# Altium PCB BatteryManagementSystem_old.PcbDoc
Units mil, origin at the board's own origin, x right, y up, seen from the top; angles counter-clockwise.
Board outline 4250 x 3500 mil, 4 copper layers (Top Layer, Power, Ground, Bottom Layer); 214 components, 165 nets, 695 pads, 117 vias.
Unrouted connection lines stored in the file: 115.
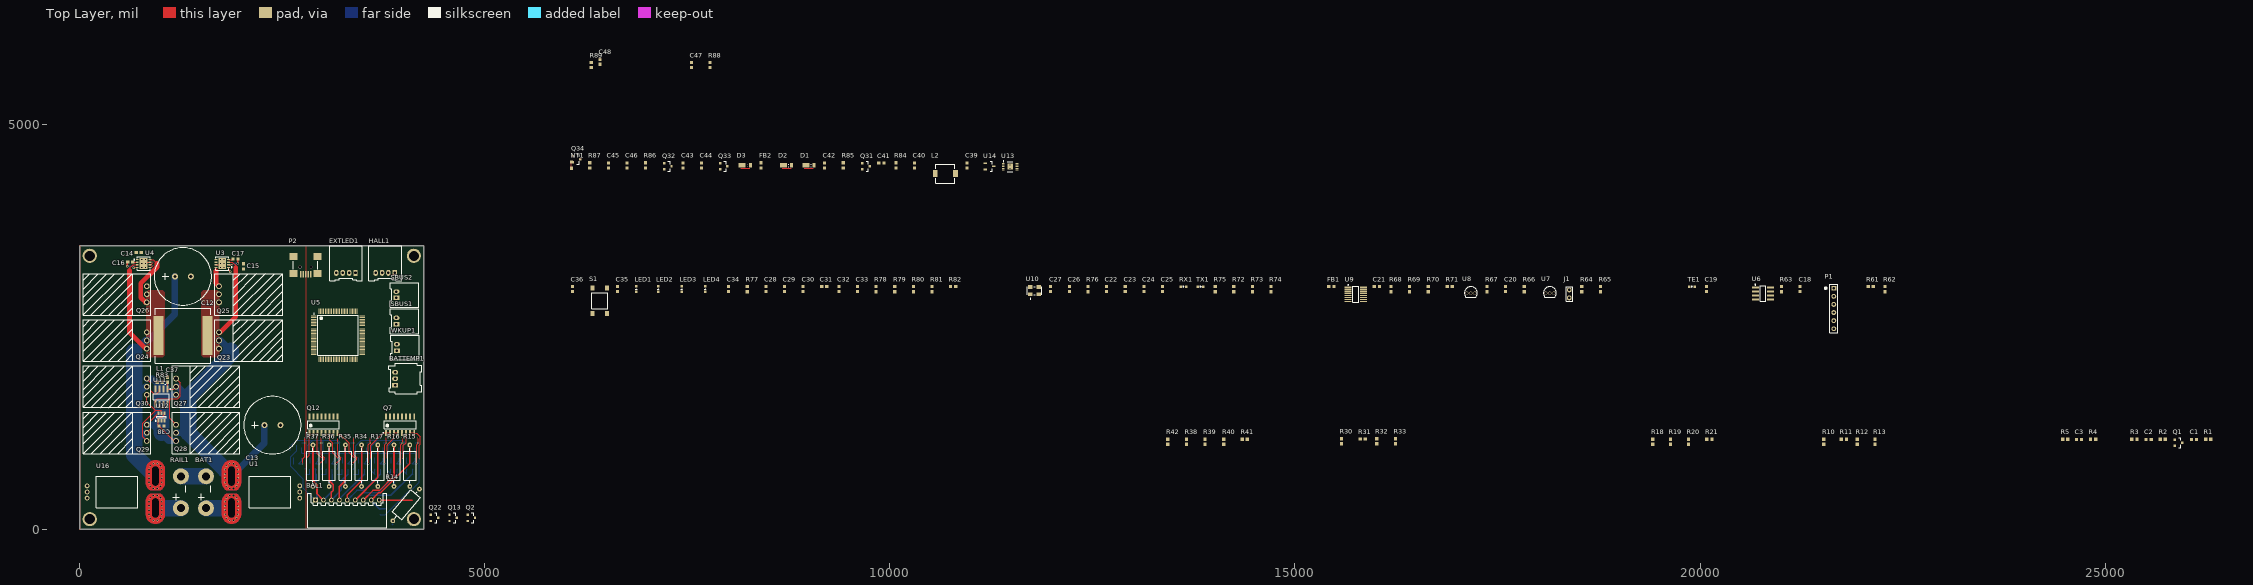
[diagram p0: Top Layer view]
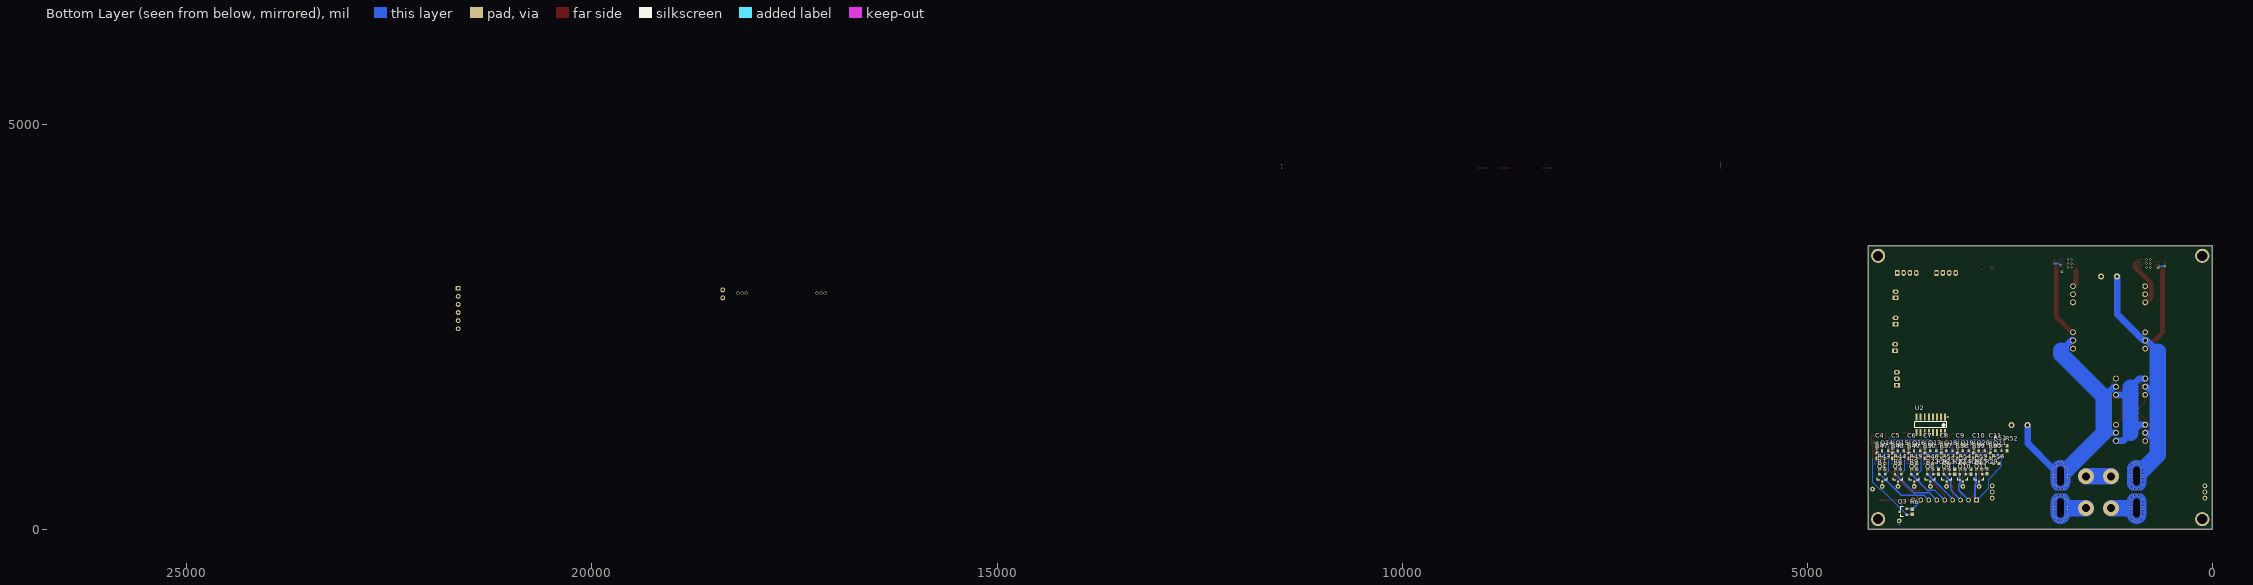
[diagram p1: Bottom Layer view, seen from below]

## Layer stack, top to bottom
Top Layer: signal copper 1.4
Dielectric: core 12.6, FR-4, Dk 4.8
Power: signal copper 1.4
Dielectric: prepreg 12.6, FR-4, Dk 4.8
Ground: signal copper 1.4
Dielectric: core 12.6, FR-4, Dk 4.8
Bottom Layer: signal copper 1.4

## Board outline
0,0 0,3500 4250,3500 4250,0

## Design rules (kind name [scope] priority, off if disabled: settings)
Clearance [All] p1: gap=10
PolygonConnect NoRelief [InComponentClass('NoRelief') vs Not InNet('GND')] p1: connectstyle=Direct reliefconductorwidth=20 reliefentries=4 polygonreliefangle="90 Angle" airgapwidth=10
PolygonConnect NoReliefGnd [InComponentClass('NoRelief') vs InNet('GND')] p2: connectstyle=Relief reliefconductorwidth=30 reliefentries=4 polygonreliefangle="90 Angle" airgapwidth=10
PolygonConnect [All] p3: connectstyle=Relief reliefconductorwidth=10 reliefentries=4 polygonreliefangle="90 Angle" airgapwidth=10
RoomDefinition U_Power [InComponentClass('U_Power')] p1: confinementstyle=ConfineIn formatcopy=TRUE lockcomponents=FALSE outline 6045,4220 11610,4220 11610,4660 6045,4660
RoomDefinition U_CPU [InComponentClass('U_CPU')] p2: confinementstyle=ConfineIn formatcopy=TRUE lockcomponents=FALSE outline 6045,2335 23395,2335 23395,3135 6045,3135
RoutingVias [All] p1: holewidth=28 width=50 viastyle="Through Hole" minholewidth=28 minwidth=50 maxholewidth=28 maxwidth=50
SilkscreenOverComponentPads [IsPad] p1: minsilkscreentomaskgap=10
SolderMaskExpansion BlobMaskExpansion [InNetClass('Blob')] p1: expansion=-25
SolderMaskExpansion [All] p2: expansion=4
Width BlobWidth [InNetClass('Blob')] p1: maxlimit=200 minlimit=10 preferedwidth=10
Width [All] p2: maxlimit=100 minlimit=10 preferedwidth=10
27 further rules are at their usual default settings.

## Classes and differential pairs
component class U_Battery: BAL1 BAT1 C1 C2 C3 C4 C5 C6 C7 C8 C9 C10 C11 Q1 Q2 Q3 Q4 Q5 Q6 Q7 Q8 Q9 Q10 Q11 Q12 Q13 Q14 Q15 Q16 Q17 Q18 Q19 Q20 Q21 Q22 R1 R2 R3 R4 R5 R6 R7 R8 R9 R10 R11 R12 R13 R14 R15 R16 R17 R18 R19 R20 R21 R22 R23 R24 R25 R26 R27 R28 R29 R30 R31 R32 R33 R34 R35 R36 R37 R38 R39 R40 R41 R42 R43 R44 R45 R46 R47 R48 R49 R50 R51 R52 R53 R54 R55 R56 R57 R58 R59 R60 U1 U2
component class U_Charge: C12 C13 C14 C15 C16 C17 L1 Q23 Q24 Q25 Q26 U3 U4
component class U_CPU: BATTEMP1 C18 C19 C20 C21 C22 C23 C24 C25 C26 C27 C28 C29 C30 C31 C32 C33 C34 C35 C36 EXTLED1 FB1 HALL1 J1 LED1 LED2 LED3 LED4 P1 P2 R61 R62 R63 R64 R65 R66 R67 R68 R69 R70 R71 R72 R73 R74 R75 R76 R77 R78 R79 R80 R81 R82 RX1 S1 SBUS1 SBUS2 TE1 TX1 U5 U6 U7 U8 U9 U10 WKUP1
component class U_Discharge: C37 C38 Q27 Q28 Q29 Q30 R83 U11 U12
component class U_Power: C39 C40 C41 C42 C43 C44 C45 C46 D1 D2 D3 FB2 L2 NT1 Q31 Q32 Q33 Q34 R84 R85 R86 R87 U13 U14
component class U_Rail: C47 C48 R88 R89 RAIL1 U16
net class BAL[8..1]: BAL1 BAL2 BAL3 BAL4 BAL5 BAL6 BAL7 BAL8
net class Blob: BAT+ GND NetBAT1_+ NetC38_2 NetRAIL1_+ RAIL+

## Components (designator, comment, footprint, x,y, rotation, side; value= is the part's Value field where it differs from the comment)
BAL1 "JST1x9" JST1x9 2910,360 r0 top
BAT1 "BATWIRE" BATWIRE12 1560,260 r90 top
BATTEMP1 "3pos RA sherlock connector" MOLEX-HDR-1X3-SHERLOCK-RA 3895,1780 r270 top
C1 "Cap" CAPC0603 26095,1110 r0 top
C2 "Cap" CAPC0603 25535,1110 r0 top
C3 "Cap" CAPC0603 24675,1110 r0 top
C4 "Cap" CAPC0603 4140,1035 r270 bottom
C5 "Cap" CAPC0603 3945,1035 r270 bottom
C6 "Cap" CAPC0603 3745,1035 r270 bottom
C7 "Cap" CAPC0603 3545,1035 r270 bottom
C8 "Cap" CAPC0603 3345,1035 r270 bottom
C9 "Cap" CAPC0603 3145,1035 r270 bottom
C10 "Cap" CAPC0603 2945,1035 r270 bottom
C11 "Cap" CAPC0603 2740,1035 r270 bottom
C12 "CapPol" CAP1000uF 1275,3120 r0 top
C13 "CapPol" CAP1000uF 2380,1285 r0 top
C14 "Cap" CAPC0603 730,3415 r0 top
C15 "Cap" CAPC0603 2025,3245 r90 top
C16 "Cap" CAPC0603 625,3300 r0 top
C17 "Cap" CAPC0603 1925,3335 r0 top
C18 "Cap" CAPC0603 21235,2965 r90 top
C19 "Cap" CAPC0603 20080,2965 r90 top
C20 "Cap" CAPC0603 17600,2965 r90 top
C21 "Cap" CAPC0603 16010,2995 r0 top
C22 "Cap" CAPC0603 12675,2965 r90 top
C23 "Cap" CAPC0603 12905,2965 r90 top
C24 "Cap" CAPC0603 13135,2965 r90 top
C25 "Cap" CAPC0603 13365,2965 r90 top
C26 "Cap" CAPC0603 12215,2965 r90 top
C27 "Cap" CAPC0603 11985,2965 r90 top
C28 "Cap" CAPC0603 8470,2965 r90 top
C29 "Cap" CAPC0603 8700,2965 r90 top
C30 "Cap" CAPC0603 8930,2965 r90 top
C31 "Cap" CAPC0603 9190,2995 r0 top
C32 "Cap" CAPC0603 9370,2965 r90 top
C33 "Cap" CAPC0603 9600,2965 r90 top
C34 "Cap" CAPC0603 8010,2965 r90 top
C35 "Cap" CAPC0603 6640,2965 r90 top
C36 "Cap" CAPC0603 6085,2965 r90 top
C37 "CapPol" CAPP0603 1085,1845 r90 top
C38 "Cap" CAPC0603 1010,1275 r180 top
C39 "Cap" CAPC0603 10950,4490 r90 top
C40 "Cap" CAPC0603 10305,4490 r90 top
C41 "Cap" CAPC0603 9895,4520 r0 top
C42 "Cap" CAPC0603 9195,4490 r90 top
C43 "Cap" CAPC0603 7445,4490 r90 top
C44 "Cap" CAPC0603 7675,4490 r90 top
C45 "Cap" CAPC0603 6525,4490 r90 top
C46 "Cap" CAPC0603 6755,4490 r90 top
C47 "Cap" CAPC0603 7550,5730 r90 top
C48 "Cap" CAPC0603 6425,5770 r90 top
D1 "DFLS160" POWERDI123 9000,4490 r0 top
D2 "DFLS160" POWERDI123 8725,4490 r0 top
D3 "DFLS160" POWERDI123 8215,4490 r0 top
EXTLED1 "MOLEX-HDR-1x4-SHERLOCK_RA" MOLEX-HDR-1X4-SHERLOCK-RA 3405,3165 r0 top
FB1 "FBead" RES0603 15450,2995 r0 top
FB2 "FBead" RES0603 8410,4490 r90 top
HALL1 "Honeywell SS49E" MOLEX-HDR-1X4-SHERLOCK-RA 3890,3165 r0 top
J1 "Jumper" HEADER_MALE_1X2 18385,2855 r90 top
L1 "Inductor" IHLP-6767 1275,2390 r0 top
L2 "Inductor" SLF7045 10685,4390 r0 top
LED1 "LED" LED0603 6870,2965 r90 top
LED2 "LED" LED0603 7140,2965 r90 top
LED3 "LED" LED0603 7430,2965 r90 top
LED4 "LED" LED0603 7720,2965 r90 top
NT1 "NetTie" NT_5mil 6070,4495 r90 top net-tie
P1 "SWD" SWD_STM32 21650,2975 r0 top
P2 "UX60-MB-5ST" UX60-MB-5ST 2790,3235 r180 top
Q1 "FDN5618P" POWERSOT-3 25905,1070 r0 top
Q2 "FDN5630" POWERSOT-3 4835,140 r0 top
Q3 "FDN5618P" POWERSOT-3 3815,215 r0 bottom
Q4 "FDN5618P" POWERSOT-3 4075,635 r270 bottom
Q5 "FDN5618P" POWERSOT-3 3880,635 r270 bottom
Q6 "FDN5618P" POWERSOT-3 3680,635 r270 bottom
Q7 "MMPQ2222A" MMPQ2222A 3955,1290 r90 top
Q8 "FDN5618P" POWERSOT-3 3480,635 r270 bottom
Q9 "FDN5618P" POWERSOT-3 3280,635 r270 bottom
Q10 "FDN5618P" POWERSOT-3 3080,635 r270 bottom
Q11 "FDN5618P" POWERSOT-3 2880,635 r270 bottom
Q12 "MMPQ2222A" MMPQ2222A 3010,1290 r90 top
Q13 "FDN5630" POWERSOT-3 4610,140 r0 top
Q14 "FDN5618P" POWERSOT-3 4040,925 r270 bottom
Q15 "FDN5618P" POWERSOT-3 3845,925 r270 bottom
Q16 "FDN5618P" POWERSOT-3 3645,925 r270 bottom
Q17 "FDN5618P" POWERSOT-3 3445,925 r270 bottom
Q18 "FDN5618P" POWERSOT-3 3245,925 r270 bottom
Q19 "FDN5618P" POWERSOT-3 3045,925 r270 bottom
Q20 "FDN5618P" POWERSOT-3 2845,925 r270 bottom
Q21 "FDN5618P" POWERSOT-3 2640,925 r270 bottom
Q22 "FDN5630" POWERSOT-3 4380,140 r0 top
Q23 "IRFB3306PbF" "TO-220AB HEATSINK" 1720,2330 r270 top
Q24 "IRFB3306PbF" "TO-220AB HEATSINK" 830,2330 r90 top
Q25 "IRFB3306PbF" "TO-220AB HEATSINK" 1720,2900 r270 top
Q26 "IRFB3306PbF" "TO-220AB HEATSINK" 830,2900 r90 top
Q27 "IRFB3306PbF" "TO-220AB HEATSINK" 1190,1760 r270 top
Q28 "IRFB3306PbF" "TO-220AB HEATSINK" 1190,1190 r270 top
Q29 "IRFB3306PbF" "TO-220AB HEATSINK" 830,1190 r90 top
Q30 "IRFB3306PbF" "TO-220AB HEATSINK" 830,1760 r90 top
Q31 "FDN5618P" POWERSOT-3 9705,4480 r0 top
Q32 "FDN5618P" POWERSOT-3 7260,4480 r0 top
Q33 "FDN5618P" POWERSOT-3 7950,4480 r0 top
Q34 "FDN5630" POWERSOT-3 6134.72,4568.15 r0 top
R1 "Res" RES0603 26270,1110 r0 top
R2 "Res" RES0603 25710,1110 r0 top
R3 "Res" RES0603 25360,1110 r0 top
R4 "Res" RES0603 24850,1110 r0 top
R5 "Res" RES0603 24505,1110 r0 top
R6 "Res" RES0603 3705,215 r270 bottom
R7 "Res" RES0603 4075,745 r180 bottom
R8 "Res" RES0603 3880,745 r180 bottom
R9 "Res" RES0603 3680,745 r180 bottom
R10 "Res" RES0603 21525,1080 r90 top
R11 "Res" RES0603 21775,1110 r0 top
R12 "Res" RES0603 21940,1080 r90 top
R13 "Res" RES0603 22160,1080 r90 top
R14 "Res" FMP200 4030,300 r50 top
R15 "Res" FMP200 4075,785 r90 top
R16 "Res" FMP200 3880,785 r90 top
R17 "Res" FMP200 3680,785 r90 top
R18 "Res" RES0603 19415,1080 r90 top
R19 "Res" RES0603 19635,1080 r90 top
R20 "Res" RES0603 19855,1080 r90 top
R21 "Res" RES0603 20115,1110 r0 top
R22 "Res" RES0603 3480,745 r180 bottom
R23 "Res" RES0603 3280,745 r180 bottom
R24 "Res" RES0603 3080,745 r180 bottom
R25 "Res" RES0603 2880,745 r180 bottom
R26 "Res" RES0603 3380,710 r90 bottom
R27 "Res" RES0603 3180,710 r90 bottom
R28 "Res" RES0603 2980,710 r90 bottom
R29 "Res" RES0603 2780,715 r90 bottom
R30 "Res" RES0603 15575,1085 r90 top
R31 "Res" RES0603 15835,1115 r0 top
R32 "Res" RES0603 16010,1085 r90 top
R33 "Res" RES0603 16240,1085 r90 top
R34 "Res" FMP200 3480,785 r90 top
R35 "Res" FMP200 3280,785 r90 top
R36 "Res" FMP200 3080,785 r90 top
R37 "Res" FMP200 2880,785 r90 top
R38 "Res" RES0603 13660,1080 r90 top
R39 "Res" RES0603 13890,1080 r90 top
R40 "Res" RES0603 14120,1080 r90 top
R41 "Res" RES0603 14380,1110 r0 top
R42 "Res" RES0603 13430,1080 r90 top
R43 "Res" RES0603 4075,810 r0 bottom
R44 "Res" RES0603 3880,810 r0 bottom
R45 "Res" RES0603 3680,810 r0 bottom
R46 "Res" RES0603 3480,810 r0 bottom
R47 "Res" RES0603 4140,910 r90 bottom
R48 "Res" RES0603 3945,910 r90 bottom
R49 "Res" RES0603 3745,910 r90 bottom
R50 "Res" RES0603 3545,910 r90 bottom
R51 "Res" RES0603 2645,1035 r180 bottom
R52 "Res" RES0603 2535,1000 r90 bottom
R53 "Res" RES0603 3280,810 r0 bottom
R54 "Res" RES0603 3080,810 r0 bottom
R55 "Res" RES0603 2880,810 r0 bottom
R56 "Res" RES0603 2670,810 r0 bottom
R57 "Res" RES0603 3345,910 r90 bottom
R58 "Res" RES0603 3145,910 r90 bottom
R59 "Res" RES0603 2945,910 r90 bottom
R60 "Res" RES0603 2740,910 r90 bottom
R61 "Res" RES0603 22105,2995 r0 top
R62 "Res" RES0603 22280,2965 r90 top
R63 "Res" RES0603 21005,2965 r90 top
R64 "Res" RES0603 18540,2965 r90 top
R65 "Res" RES0603 18770,2965 r90 top
R66 "Res" RES0603 17830,2965 r90 top
R67 "Res" RES0603 17370,2965 r90 top
R68 "Res" RES0603 16185,2965 r90 top
R69 "Res" RES0603 16415,2965 r90 top
R70 "Res" RES0603 16645,2965 r90 top
R71 "Res" RES0603 16910,2995 r0 top
R72 "Res" RES0603 14245,2965 r90 top
R73 "Res" RES0603 14475,2965 r90 top
R74 "Res" RES0603 14705,2965 r90 top
R75 "Res" RES0603 14015,2965 r90 top
R76 "Res" RES0603 12445,2965 r90 top
R77 "Res" RES0603 8240,2965 r90 top
R78 "Res" RES0603 9830,2965 r90 top
R79 "Res" RES0603 10060,2965 r90 top
R80 "Res" RES0603 10290,2965 r90 top
R81 "Res" RES0603 10520,2965 r90 top
R82 "Res" RES0603 10780,2995 r0 top
R83 "Res" RES0603 990,1815 r180 top
R84 "Res" RES0603 10075,4490 r90 top
R85 "Res" RES0603 9425,4490 r90 top
R86 "Res" RES0603 6985,4490 r90 top
R87 "Res" RES0603 6295,4490 r90 top
R88 "Res" RES0603 7780,5730 r90 top
R89 "Res" RES0603 6315,5730 r90 top
RAIL1 "BATWIRE" BATWIRE12 1250,260 r90 top
RX1 "LED" LED0603 13625,2995 r0 top
S1 "Button" PTS645xxxxSMTR92 6420,2820 r90 top
SBUS1 "2-pin Horz Sherlock" MOLEX-HDR-1X2-SHERLOCK-HORZ 3910,2530 r270 top
SBUS2 "2-pin Horz Sherlock" MOLEX-HDR-1X2-SHERLOCK-HORZ 3910,2855 r270 top
TE1 "LED" LED0603 19900,2995 r0 top
TX1 "LED" LED0603 13835,2995 r0 top
U1 "ACS756" ACS756 1875,460 r90 top
U2 "SN74LV4052A" SN74LV4052AD 3475,1290 r270 bottom
U3 "UCC27201A" UCC27201ADRMT 1760,3280 r180 top
U4 "UCC27201A" UCC27201ADRMT 790,3280 r0 top
U5 "STM32F103VC" STM32F103VC 3190,2395 r0 top
U6 "ISL83485" ISL8348xIBZ 20775,2910 r0 top
U7 "MCP9701" MCP970x-E/TO 18145,2915 r0 top
U8 "MCP9701" MCP970x-E/TO 17170,2915 r0 top
U9 "FT230XS" FT230XS 15750,2900 r0 top
U10 "636L3C008M" 636L3C 11785,2945 r0 top
U11 "MIC5011" MIC5011 1010,1635 r270 top
U12 "LM5050-1" LM5050 1010,1385 r90 top
U13 "LT3991-5" LT3991 11485,4475 r0 top
U14 "MCP1703AT" MCP1703A 11230,4480 r0 top
U16 "ACS756" ACS756 935,460 r270 top
WKUP1 "2-pin Horz Sherlock" MOLEX-HDR-1X2-SHERLOCK-HORZ 3915,2205 r270 top

## Footprints (in the part's own frame and the unit in brackets; to place one, negate y for a bottom-side part, rotate by r counter-clockwise, add the part's x,y. Pads: shape width x height; smd on the part's side, far side on the other; paste and mask are expansions set on the pad)
636L3C [mm]
  rect 1.4x1.2 smd: 1(-1.27,-1.1) 2(1.27,-1.1) 3(1.27,1.1) 4(-1.27,1.1)
  silkscreen extent -2.3,-2.65 2.3,1.3
ACS756 [mm] "Hall Effect-Based Linear Current Sensor"
  round 1.5 hole 0.8: 1(-1.91,-21.4) 2(0,-21.4) 3(1.91,-21.4)
  round 0 hole 2 slot 6 at 0 deg paste+0 mask+0: 4(5,0) 5(-5,0)
  Multi-Layer region: 0.513,-1.673 1.592,-2.644 3,-2.995 3,-2.995 7,-2.995 8.302,-2.698 9.345,-1.866 9.925,-0.663 9.925,0.672 9.345,1.875 8.302,2.708 7,3.005 7,3.005 3,3.005 1.592,2.653 0.513,1.682 0.513,1.682
  Multi-Layer region: -0.513,-1.673 -1.592,-2.644 -3,-2.995 -3,-2.995 -7,-2.995 -8.302,-2.698 -9.345,-1.866 -9.925,-0.663 -9.925,0.672 -9.345,1.875 -8.302,2.708 -7,3.005 -7,3.005 -3,3.005 -1.592,2.653 -0.513,1.682 -0.513,1.682
  silkscreen extent -5,-18.5 5,-5.5, body extent -5,-18.5 5,-5.5, height 7
BATWIRE12 [mm] "Two 12AWG wires soldered directly to the board"
  round 5 hole 2.5: +(0,0) -(10,0)
  silkscreen extent 2.5,-1.5 7,2.5
CAP1000uF [mm] "CAP ALUM 1000UF 50V 20% RADIAL"
  round 1.9 hole 1.05: 1(-2.5,0) 2(2.5,0)
  silkscreen extent -9,-9 9,9, body extent -8.93,-8.98 9,8.98, height 20
CAPC0603 [mm] "Chip Capacitor, 2-Leads, Body 1.60x0.80mm, IPC Medium Density"
  rect 1x0.95 smd: 1(-0.8,0) 2(0.8,0)
  body extent -0.88,-0.48 0.87,0.48, height 0.8
CAPP0603 [mm] "Chip Capacitor, 2-Leads, Body 1.60x0.80mm, IPC Medium Density"
  rect 1x0.95 smd: 1(-0.8,0) 2(0.8,0)
  silkscreen extent -1.56,0.64 -1.46,0.74, body extent -0.88,-0.48 0.87,0.48, height 0.8
FMP200 [mm] "Power resistor Yageo 2W"
  round 1.5 hole 0.65: 1(-6.5,0) 2(6.5,0)
  silkscreen extent -5.5,-1.95 5.5,1.95, body extent -4.5,-1.93 4.5,1.95, height 3.9
FT230XS [mm] "SOP, 16-Leads, Body 4.90x3.90mm, Pitch 0.64mm, IPC Medium Density"
  rect 2.2x0.35 smd: 1(-2.4,2.222) 2(-2.4,1.587) 3(-2.4,0.953) 4(-2.4,0.318) 5(-2.4,-0.318) 6(-2.4,-0.953) 7(-2.4,-1.587) 8(-2.4,-2.222) 9(2.4,-2.222) 10(2.4,-1.587) 11(2.4,-0.953) 12(2.4,-0.318) 13(2.4,0.318) 14(2.4,0.953) 15(2.4,1.587) 16(2.4,2.222)
  silkscreen extent -2.52,-2.5 0.9,3.07, body extent -2,-2.5 2,2.5, height 1.76
HEADER_MALE_1X2 [mil]
  round 60 hole 30: 1(0,0) 2(100,0)
  silkscreen extent -40,-40 140,40
IHLP-6767 [mm] "Low profile, high current IHLP inductor"
  rect 3.125x12.19 smd: 1(-7.648,0) 2(7.648,0)
  silkscreen extent -8.65,-8.6 8.65,8.6, body extent -8.64,-8.58 8.64,8.57, height 7
ISL8348xIBZ [mm] "SOIC, 8-Leads, Body 4.90x3.90mm, Pitch 1.27mm, IPC Medium Density"
  rect 2.2x0.6 smd: 1(-2.4,1.905) 2(-2.4,0.635) 3(-2.4,-0.635) 4(-2.4,-1.905) 5(2.4,-1.905) 6(2.4,-0.635) 7(2.4,0.635) 8(2.4,1.905)
  silkscreen extent -2.52,-2.5 0.9,2.88, body extent -2,-2.5 2,2.5, height 1.75
JST1x9 [mm]
  rect 1.5x1.5 hole 0.9: 1(0,0)
  round 1.5 hole 0.9: 2(2.5,0) 3(5,0) 4(7.5,0) 5(10,0) 6(12.5,0) 7(15,0) 8(17.5,0) 9(20,0)
  silkscreen extent -2.4,-8.7 22.4,2.2
LED0603 [mm] "Chip LED, 2-Leads, Body 1.60x0.80mm, IPC Medium Density"
  rect 0.8x0.8 smd: A(-0.825,0) C(0.825,0)
  silkscreen extent -0.13,-0.25 0.12,0.25, body extent -0.88,-0.48 0.87,0.47, height 0.8
LM5050 [mm] "SOT23, 6-Leads, Body 2.90x2.80mm, Pitch 0.95mm, IPC Medium Density"
  rect 1.1x0.6 smd: 1(-1.175,0.95) 2(-1.175,0) 3(-1.175,-0.95) 4(1.175,-0.95) 5(1.175,0) 6(1.175,0.95)
  silkscreen extent -1.3,-1.55 0.25,1.92, body extent -0.87,-1.52 0.88,1.53, height 1.1
LT3991 [mm] "TSSOP, 10-Leads, Body 3.00x3.00mm, Pitch 0.50mm, Thermal Pad 1.88.2x1.68.2mm, IPC Medium Density"
  rect 0.889x0.305 smd: 1(-2.175,1) 2(-2.175,0.5) 3(-2.175,0) 4(-2.175,-0.5) 5(-2.175,-1) 6(2.175,-1) 7(2.175,-0.5) 8(2.175,0) 9(2.175,0.5) 10(2.175,1)
  rect 1.68x1.88 smd: PAD(0,0)
  silkscreen extent -2.2,-1.55 0.85,1.82, body extent -1.55,-1.55 1.55,1.55, height 1.1
MCP970x-E/TO [mm] "Low-Power Linear Active Thermistor ICs"
  round 1 hole 0.8: 1(-1.27,0) 2(0,0) 3(1.27,0)
  silkscreen extent -2.03,-1.31 2.03,2.03, body extent -2.33,-2.35 2.35,2.35, height 5.3
MCP1703A [mm] "SOT23, 3-Leads, Body 2.90x2.55mm, Pitch 0.95mm, IPC Medium Density"
  rect 1x0.6 smd: 1(-1.35,0.95) 2(-1.35,-0.95) 3(1.35,0)
  silkscreen extent 0.3,-1.55 0.9,1.55, body extent -0.9,-1.55 0.9,1.55, height 1.45
MIC5011 [mm] "SOIC, 8-Leads, Body 4.90x3.90mm, Pitch 1.27mm, IPC Medium Density"
  rect 2.2x0.6 smd: 1(-2.4,1.905) 2(-2.4,0.635) 3(-2.4,-0.635) 4(-2.4,-1.905) 5(2.4,-1.905) 6(2.4,-0.635) 7(2.4,0.635) 8(2.4,1.905)
  silkscreen extent -2.52,-2.5 0.9,2.88, body extent -2,-2.5 2,2.5, height 1.63
MMPQ2222A [mm] "SOIC, 16-Leads, Body 9.90x3.90mm, Pitch 1.27mm, IPC Medium Density"
  rect 1.85x0.6 smd: 1(-2.575,3.175) 1(-2.575,4.445) 3(-2.575,0.635) 3(-2.575,1.905) 5(-2.575,-1.905) 5(-2.575,-0.635) 7(-2.575,-4.445) 7(-2.575,-3.175) 9(2.575,-4.445) 10(2.575,-3.175) 11(2.575,-1.905) 12(2.575,-0.635) 13(2.575,0.635) 14(2.575,1.905) 15(2.575,3.175) 16(2.575,4.445)
  silkscreen extent -2.7,-5 1.25,5.42, body extent -2,-5 2,5, height 1.75
MOLEX-HDR-1X2-SHERLOCK-HORZ [mm]
  rect 1.397x1.905 hole 0.8: 1(0,0)
  oval 1.397x1.905 hole 0.8: 2(-2,0)
  silkscreen extent -4.83,-1.91 2.92,6.98, body extent -4.83,-1.91 2.87,8.59, height 5.54
MOLEX-HDR-1X3-SHERLOCK-RA [mm]
  rect 1.397x1.905 hole 0.8: 1(0,0)
  oval 1.397x1.905 hole 0.8: 2(-2,0) 3(-4,0)
  silkscreen extent -6.86,-2.03 2.79,8.38, body extent -6.88,-1.99 2.82,8.51, height 5.75
MOLEX-HDR-1X4-SHERLOCK-RA [mm]
  rect 1.397x1.905 hole 0.8: 1(0,0)
  oval 1.397x1.905 hole 0.8: 2(-2,0) 3(-4,0) 4(-6,0)
  silkscreen extent -8.15,-2.55 2.15,8.46, body extent -8.17,-1.98 2.13,8.52, height 5.54
NT_5mil [mm] "Thin Net Tie"
  rect 1x1 smd paste+0 mask+0: 1(-1,0) 2(1,0)
  Top Layer lines w0.127: -1,0 1,0
POWERDI123 [mm] "Diodes INC Power Diode"
  rect 0.9x1.4 smd: A(1.6,0)
  rect 2.2x1.4 smd: C(-0.95,0)
  Top Layer lines w0.254: -1.397,-0.889 1.397,-0.889
  silkscreen extent 0.6,-0.4 0.7,0.4, body extent -1.4,-0.89 1.4,0.89, height 0.98
POWERSOT-3 [mm] "SOT23, 3-Leads, Body 2.92x2.47mm, Pitch 0.95mm, IPC Medium Density"
  rect 0.76x0.76 smd: D(1.145,0) G(-1.145,0.95) S(-1.145,-0.95)
  silkscreen extent 0.04,-1.55 0.74,1.55, body extent -0.74,-1.52 0.74,1.53, height 1.12
PTS645xxxxSMTR92 [mm] "PTS645 Series SMT 6 mm Tactile Switch"
  rect 1.555x1.3 smd: A(-3.975,2.25) A(3.975,2.25) B(-3.975,-2.25) B(3.975,-2.25)
  silkscreen extent -2.5,-2.5 2.5,2.5, body extent -3,-3 3,3, height 4.5
RES0603 [mm] "Chip Resistor, 2-Leads, Body 1.60x0.80mm, IPC Medium Density"
  rect 1.05x1 smd: 1(-0.8,0) 2(0.8,0)
  body extent -0.88,-0.48 0.87,0.47, height 0.8
SLF7045 [mm] "Inductors for Power Circuits Wound Ferrite"
  rect 1.5x2.2 smd: 1(-3.15,0) 2(3.15,0)
  silkscreen extent -3,-3 3,3, body extent -3.5,-3.5 3.5,3.5, height 4.5
SN74LV4052AD [mm] "SOIC, 16-Leads, Body 10.0x4.0mm (max), Pitch 1.27mm, IPC Medium Density"
  rect 2.2x0.6 smd: 1(-2.4,4.445) 2(-2.4,3.175) 3(-2.4,1.905) 4(-2.4,0.635) 5(-2.4,-0.635) 6(-2.4,-1.905) 7(-2.4,-3.175) 8(-2.4,-4.445) 9(2.4,-4.445) 10(2.4,-3.175) 11(2.4,-1.905) 12(2.4,-0.635) 13(2.4,0.635) 14(2.4,1.905) 15(2.4,3.175) 16(2.4,4.445)
  silkscreen extent -2.52,-5 0.9,5.42, body extent -2,-5 2,5, height 1.75
STM32F103VC [mm] "STM32F103 LQFP100 package"
  rect 1.75x0.3 smd: 1(-7.575,6) 2(-7.575,5.5) 3(-7.575,5) 4(-7.575,4.5) 5(-7.575,4) 6(-7.575,3.5) 7(-7.575,3) 8(-7.575,2.5) 9(-7.575,2) 10(-7.575,1.5) 11(-7.575,1) 12(-7.575,0.5) 13(-7.575,0) 14(-7.575,-0.5) 15(-7.575,-1) 16(-7.575,-1.5) 17(-7.575,-2) 18(-7.575,-2.5) 19(-7.575,-3) 20(-7.575,-3.5) 21(-7.575,-4) 22(-7.575,-4.5) 23(-7.575,-5) 24(-7.575,-5.5) 25(-7.575,-6) 51(7.575,-6) 52(7.575,-5.5) 53(7.575,-5) 54(7.575,-4.5) 55(7.575,-4) 56(7.575,-3.5) 57(7.575,-3) 58(7.575,-2.5) 59(7.575,-2) 60(7.575,-1.5) 61(7.575,-1) 62(7.575,-0.5) 63(7.575,0) 64(7.575,0.5) 65(7.575,1) 66(7.575,1.5) 67(7.575,2) 68(7.575,2.5) 69(7.575,3) 70(7.575,3.5) 71(7.575,4) 72(7.575,4.5) 73(7.575,5) 74(7.575,5.5) 75(7.575,6)
  rect 0.3x1.75 smd: 26(-6,-7.575) 27(-5.5,-7.575) 28(-5,-7.575) 29(-4.5,-7.575) 30(-4,-7.575) 31(-3.5,-7.575) 32(-3,-7.575) 33(-2.5,-7.575) 34(-2,-7.575) 35(-1.5,-7.575) 36(-1,-7.575) 37(-0.5,-7.575) 38(0,-7.575) 39(0.5,-7.575) 40(1,-7.575) 41(1.5,-7.575) 42(2,-7.575) 43(2.5,-7.575) 44(3,-7.575) 45(3.5,-7.575) 46(4,-7.575) 47(4.5,-7.575) 48(5,-7.575) 49(5.5,-7.575) 50(6,-7.575) 76(6,7.575) 77(5.5,7.575) 78(5,7.575) 79(4.5,7.575) 80(4,7.575) 81(3.5,7.575) 82(3,7.575) 83(2.5,7.575) 84(2,7.575) 85(1.5,7.575) 86(1,7.575) 87(0.5,7.575) 88(0,7.575) 89(-0.5,7.575) 90(-1,7.575) 91(-1.5,7.575) 92(-2,7.575) 93(-2.5,7.575) 94(-3,7.575) 95(-3.5,7.575) 96(-4,7.575) 97(-4.5,7.575) 98(-5,7.575) 99(-5.5,7.575) 100(-6,7.575)
  silkscreen extent -7.7,-6.3 6.3,6.82, body extent -7,-7 7,7, height 1.6
SWD_STM32 [mil] "SWD connector matching the pinout on STM Discovery Boards"
  rect 60x60 hole 30: 1(0,0)
  round 60 hole 30: 2(0,-100) 3(0,-200) 4(0,-300) 5(0,-400) 6(0,-500)
  silkscreen extent -110,-550 50,50
"TO-220AB HEATSINK" [mm] "HEXFET Power MOSFET w/ Heat Sink"
  round 1.8 hole 1.15: D(0,0) G(-2.54,0) S(2.54,0)
  silkscreen extent -6.53,-1.25 6.52,20, body extent -6.44,-0.15 6.36,19.9, height 12.7
UCC27201ADRMT [mm] "IC DVR HIGH/LOW SIDE 3A 8VSON"
  rect 0.85x0.35 smd: 1(-1.975,1.2) 2(-1.975,0.4) 3(-1.975,-0.4) 4(-1.975,-1.2) 5(1.975,-1.2) 6(1.975,-0.4) 7(1.975,0.4) 8(1.975,1.2)
  rect 2.45x3.38 smd: 7(0,0)
  silkscreen extent -3.08,-2.05 2.05,2.05, body extent -2.05,-2.05 2.05,2.05, height 1
UX60-MB-5ST [mm] "USB Mini-B Recepticle"
  rect 0.5x2 smd: 1(-1.6,2.25) 2(-0.8,2.25) 3(0,2.25) 4(0.8,2.25) 5(1.6,2.25)
  rect 2.5x2.2 smd: SHD(-3.75,2) SHD(-3.75,-3.3) SHD(3.75,2) SHD(3.75,-3.3)
  round 0.9 hole 0.9 unplated: ""(-1.75,0) ""(1.75,0)
  silkscreen extent -3.85,-1.92 3.85,0.63

## Part data
BAT1 RAIL1: "Two large gauge leads soldered directly to the board."
BATTEMP1: library part MOLEX-HDR-1x3-SHERLOCK_RA, "Header, Molex, 2mm Pitch Sherlock Header, Single Row, Right Angle 3 Circuits, Length 3.3mm"
D1 D2 D3: "1.0A Surface Mount Schottky Barrier Rectifier"
EXTLED1: "Header, Molex, 2mm Pitch Sherlock Header, Single Row, Horizontal, 4 Circuits, Length 3.3mm"
FB1 FB2: "Ferrite Bead"
HALL1: library part MOLEX-HDR-1x4-SHERLOCK_RA, "Header, Molex, 2mm Pitch Sherlock Header, Single Row, Horizontal, 4 Circuits, Length 3.3mm"
J1: "Single Jumper on 1x2 Male Header"
NT1: "Ties two nets together"
P1: library part SWD_STM32, "SWD connector matching the pinout on STM Discovery Boards"
P2: "USB Mini B Metal Shield SMT Type With Positioning Post"
Q1 Q3 Q4 Q5 Q6 Q8 Q9 Q10 Q11 Q14 Q15 Q16 Q17 Q18 Q19 Q20 Q21 Q31 Q32 Q33: "60V P-Channel Logic Level PowerTrench MOSFET"
Q2 Q13 Q22 Q34: "60V N-Channel PowerTrench MOSFET"
Q7 Q12: "Quad NPN General Purpose Amplifier"
Q23 Q24 Q25 Q26 Q27 Q28 Q29 Q30: library part IRFx3306PbF, "HEXFET Power MOSFET"
S1: "SPST Button"
SBUS1 SBUS2 WKUP1: library part MOLEX-HDR-1x2-SHERLOCK_RA, "Header, Molex, 2mm Pitch Sherlock Header, Single Row, Horizontal, 2 Circuits, Length 3.3mm,  0353630260"
U1 U16: "Hall Effect-Based Linear Current Sensor IC"
U2: "Dual 4-Channel Analog Multiplexers/Demultiplexers"
U3 U4: "IC DVR HIGH/LOW SIDE 3A 8SOPWR"
U5: "Mainstream Performance line, ARM Cortex-M3 MCU"
U6: "3.3V RS485 Transceiver"
U7 U8: library part MCP970x, "Low-Power Linear Active Thermistor ICs"
U9: "USB To Basic UART IC"
U10: library part 636L3C, "HCMOS/TTL Clock Oscillator"
U11: "Minimum Parts High- or Low-Side MOSFET Driver"
U12: library part LM5050, "High-Side OR-ing FET Controller"
U13: library part LT3991, "55V, 1.2A Step-Down Regulator with 2.8uA Quiescent Current"
U14: "250 mA, 16V, Low Quiescent Current LDO Regulator"

## Free pads (board coordinates)
  round 175 hole 125: ""(125,125) ""(125,3375) ""(4125,125) ""(4125,3375)

## Via types
v1: diameter 23.62, hole 19.68, Top Layer to Bottom Layer, 64 vias
v2: diameter 20, hole 8, Top Layer to Bottom Layer, 32 vias
v3: diameter 25.98, hole 12.99, Top Layer to Bottom Layer, tented top, 12 vias
v4: diameter 30, hole 20, Top Layer to Bottom Layer, 5 vias
v5: diameter 15, hole 5, Top Layer to Bottom Layer, 2 vias
v6: diameter 19.68, hole 7.87, Top Layer to Bottom Layer, 2 vias

## Nets (pads, with @x,y where several pads share a name; then routed paths per layer and width w, separated by ;. In a path a pad name is that pad's centre, name@x,y a point inside that pad or via, vN(x,y) a via of type N, cw(c..) or ccw(c..) an arc to the next point about the centre after c; other vN are vias at no path point)
3V3: BATTEMP1.1 C18.2 C19.2 C20.2 C21.2 C28.1 C29.1 C30.1 C31.1 C32.1 C33.1 C34.1 C36.1 C42.1 FB2.2 P1.1 Q31.S R61.1 R62.1 R63.1 R68.1 R69.1 R70.1 R71.1 R78.1 R79.1 R80.1 R81.1 R82.1 R84.1 U5.6 U5.11 U5.28 U5.50 U5.75 U5.100 U6.8 U7.1 U8.1 U10.4 U14.2
3V3_E\N\: Q31.G Q32.G R84.2 U5.46
3V3EN: EXTLED1.1 HALL1.1 Q31.D
5V: C41.1 L2.2 U13.1 U13.6 U14.3
15V: C14.1 C15.1 C46.1 U3.1 U4.1 | length 62
  Top Layer w10: U3.1 1837.76,3202.24 v4(1860,3180)
15V_EN: Q34.G U5.38
A3V3: C2.1 C43.1 C44.1 FB2.1 Q32.S R77.1 U2.16 U5.22
A3V3EN: C1.1 C47.1 Q32.D U1.1 U16.1
AGND: C1.2 C3.2 C4.2 C5.2 C6.2 C7.2 C8.2 C9.2 C10.2 C11.2 C43.2 C44.2 C47.2 C48.2 NT1.2 Q2.S R4.2 R47.2 R48.2 R49.2 R50.2 R57.2 R58.2 R59.2 R60.2 R89.2 U1.2 U5.19 U5.20 U16.2 | length 1904.5
  Bottom Layer w10: C11.2 R60.2 2741.38,940.12 3343.62,940.12 R57.2 ; R59.2 C10.2 ; R58.2 C9.2 ; C8.2 R57.2 ; C7.2 R50.2 ; R49.2 C6.2 ; R48.2 C5.2@3945,1008.5 ; C4.2 R47.2 4138.62,940.12 3546.38,940.12 R50.2 ; R57.2 3346.38,940.12 3543.62,940.12 R50.2
BAL1: R10.1 U5.59 U5.63
BAL2: R11.1 U5.60 U5.64
BAL3: R12.1 U5.61 U5.65
BAL4: R13.1 U5.62 U5.66
BAL5: R30.1
BAL6: R31.1
BAL7: R32.1
BAL8: R33.1
BAT+: C13.1 C37.1 D3.A Q1.S Q23.D Q27.D Q28.D R1.1 U1.4 U11.1 | length 3533
  Top Layer w10: C37.1 U11.1 1159.49,1729.49 Q27.D
  Bottom Layer w80: Q28.D 1338.15,1190 ; Q27.D 1215,1760 1340,1635 ; Q23.D 1740.82,2330 1865.43,2205.39 ; U1.4 v1(1953.74,735.59) 2281.57,1063.43 C13.1
  Bottom Layer w200: 1865.43,2205.39 1865.43,2160.43 1340,1635 1340,1191.85 v1(1796.26,735.59) U1.4
  other v1: 1850.67,503.22 1899.33,503.22 1811.3,531.83 1938.7,531.83 1796.26,578.11 1953.74,578.11 1796.26,630.47 1953.74,630.47 1796.26,682.83 1953.74,682.83 1811.3,781.87 1938.7,781.87 1850.67,810.48 1899.33,810.48
BAT_CVH: U2.3 U5.26
BAT_CVL: U2.13 U5.25
BAT_CVSELA: U2.10 U5.43
BAT_CVSELB: U2.9 U5.44
BAT_I: U1.3 U5.23
BAT_SENS_EN: Q2.G Q13.G Q22.G R5.1 U5.45
BAT_V: C3.1 R3.2 R4.1 U5.24
BOOST_H: U3.5 U5.42
BOOST_L: U3.6 U5.41
BOOT0: R76.1 U5.94 U9.15
BUCK_H: U4.5 U5.40 | length 46.5
  Top Layer w10: U4.5 882.76,3232.76 v5(905,3255)
BUCK_L: U4.6 U5.39 | length 54
  Top Layer w10: U4.6 881.1,3264.25 905,3288.16 v5(905,3295)
BUZZER: U5.48
C1: BAL1.8 Q3.S Q14.S R6.1 R15.2 | length 1189
  Top Layer w20: BAL1.8 3688.54,449.57 3712.94,449.57 4075,811.63 R15.2
  Bottom Layer w10: R15.2 4077.4,1038.5 Q14.S
  Bottom Layer w20: BAL1.8 3598.98,352.52 R6.1 3710.91,252.4 Q3.S
C2: BAL1.7 Q4.S Q15.S R7.1 R16.2 | length 1768.8
  Top Layer w20: BAL1.7 3620.12,479.57 3700.52,479.57 3880,659.05 R16.2
  Bottom Layer w10: R16.2 3882.4,1038.5 Q15.S ; R7.1 4112.4,739.09 Q4.S
  Bottom Layer w20: BAL1.7 3560.12,419.57 3840.52,419.57 4101.03,680.08 Q4.S
C3: BAL1.6 Q5.S Q16.S R8.1 R17.2 | length 1579.7
  Top Layer w20: BAL1.6 3680,637.87 R17.2
  Bottom Layer w10: Q16.S R17.2@3682.4,1038.5 ; R8.1 3917.4,739.09 Q5.S
  Bottom Layer w20: BAL1.6 3491.69,449.57 3681.44,449.57 3911.95,680.08 Q5.S
C4: BAL1.5 Q6.S Q17.S R9.1 R34.2 R42.1 | length 1431.1
  Top Layer w20: BAL1.5 3303.7,422.84 3480,599.14 R34.2
  Bottom Layer w10: R34.2 3482.4,1038.5 Q17.S ; Q6.S R9.1@3717.4,739.09
  Bottom Layer w20: BAL1.5 3423.27,479.57 3511.44,479.57 3711.95,680.08 Q6.S
C5: BAL1.4 Q8.S Q18.S R22.1 R35.2 | length 1295.3
  Top Layer w20: BAL1.4 3205.28,524.41 3280,599.14 R35.2
  Bottom Layer w10: R35.2 3282.4,1038.5 Q18.S ; Q8.S R22.1@3517.4,739.09
  Bottom Layer w20: BAL1.4 3205.28,373.4 3511.95,680.08 Q8.S
C6: BAL1.3 Q9.S Q19.S R23.1 R36.2 | length 1252.1
  Top Layer w20: R36.2 3080,599.14 3129.53,549.61 3129.53,479.57 3106.85,456.89 BAL1.3
  Bottom Layer w10: R36.2 3082.4,1038.5 Q19.S ; Q9.S R23.1@3317.4,739.09
  Bottom Layer w20: BAL1.3 3230.47,483.62 3230.47,598.6 3311.95,680.08 Q9.S
C7: BAL1.2 Q10.S Q20.S R24.1 R37.2 | length 1240.2
  Top Layer w20: R37.2 2880,599.14 2929.53,549.61 2929.53,438.9 BAL1.2
  Bottom Layer w10: R37.2 2882.4,1038.5 Q20.S ; Q10.S R24.1@3117.4,739.09
  Bottom Layer w20: BAL1.2 3129.53,481.1 3129.53,549.61 3117.4,561.74 Q10.S
C8: BAL1.1 Q11.S Q21.S R25.1 R51.1 | length 1236.1
  Bottom Layer w10: R51.1 2677.4,1034.09 Q21.S 2677.4,968.46 2602.83,893.89 2602.83,775.31 2762.05,616.1 2762.05,507.95 BAL1.1 ; Q11.S R25.1@2917.4,734.09
  Bottom Layer w20: R25.1@2906.5,745 R25.1@2917.4,734.09 ; BAL1.1 2929.53,379.53 2929.53,549.61 2917.4,561.74 Q11.S
CGND: BAL1.9 R14.2 | length 406.1
  Top Layer w20: BAL1.9 4103.46,360
CLK8MHZ: U5.12 U10.3
DEBUG_CTS: R71.2 U5.70 U9.6
DEBUG_RTS: R70.2 U5.71 U9.2
DEBUG_RXI: R68.2 U5.69 U9.1
DEBUG_TXO: R69.2 U5.68 U9.4
DISCHARGE_EN: R83.1 U5.5 U11.2
EXTLED_CLK: EXTLED1.3
EXTLED_DATA: EXTLED1.2
GND: BAT1.- BATTEMP1.3 C2.2 C12.2 C13.2 C14.2 C15.2 C18.1 C19.1 C20.1 C21.1 C22.2 C23.2 C24.2 C25.2 C27.2 C28.2 C29.2 C30.2 C31.2 C32.2 C33.2 C34.2 C35.2 C36.2 C37.2 C38.1 C40.2 C41.2 C42.2 C45.2 C46.2 D1.A EXTLED1.4 HALL1.4 NT1.1 P1.3 P2.5 P2.SHD Q7.10 Q7.12 Q7.14 Q7.16 Q12.10 Q12.12 Q12.14 Q12.16 Q13.S Q22.S Q25.S Q26.S Q34.S R5.2 R18.2 R19.2 R20.2 R21.2 R38.2 R39.2 R40.2 R41.2 R64.2 R65.2 R67.2 R76.2 R83.2 R85.2 RAIL1.- S1.A U2.6 U2.7 U3.7 U4.7 U5.10 U5.27 U5.49 U5.74 U5.99 U6.5 U7.3 U8.3 U9.5 U9.13 U10.2 U11.4 U12.3 U13.10 U13.PAD U14.1 | length 434
  Top Layer w10: U4.7@805.75,3295.75 U4.7@867.76,3295.75 ; U3.7@1682.24,3264.25 U3.7@1744.25,3264.25
  Bottom Layer w200: RAIL1.- BAT1.-
  other v3: 766.38,3232.76 813.62,3232.76 1736.38,3232.76 1783.62,3232.76 766.38,3280 813.62,3280 1736.38,3280 1783.62,3280 766.38,3327.24 813.62,3327.24 1736.38,3327.24 1783.62,3327.24
  other v6: 11485,4453.35 11485,4496.65
HALL_CHARGE: HALL1.2 U5.31
HALL_DISCHARGE: HALL1.3 U5.32
HALL_EN: U5.33
LED1: LED1.C U5.1
LED2: LED2.C U5.2
LED3: LED3.C U5.3
LED4: LED4.C U5.4
NetBAT1_+: BAT1.+ U1.5 | length 311.9
  Bottom Layer w200: BAT1.+ 1871.85,260
  other v1: 1850.67,109.52 1899.33,109.52 1811.3,138.13 1938.7,138.13 1796.26,184.41 1953.74,184.41 1796.26,236.77 1953.74,236.77 1796.26,289.13 1953.74,289.13 1796.26,341.89 1953.74,341.89 1811.3,388.17 1938.7,388.17 1850.67,416.78 1899.33,416.78
NetC4_1: C4.1 R43.2 R47.1 U2.12 | length 504.8
  Top Layer w10: v2(4160,810) 4160,1045 v2(4180,1065) v2(4180,1130)
  Bottom Layer w10: R47.1 4140,843.5 R43.2 v2(4160,810) ; C4.1 4141.5,1065 v2(4180,1065)
NetC5_1: C5.1 R44.2 R48.1 U2.14 | length 504.8
  Top Layer w10: v2(3965,810) 3965,1045 v2(3985,1065) v2(3985,1130)
  Bottom Layer w10: R48.1 3945,843.5 R44.2 v2(3965,810) ; C5.1 3946.5,1065 v2(3985,1065)
NetC6_1: C6.1 R45.2 R49.1 U2.15 | length 494.8
  Top Layer w10: v2(3765,810) 3765,1045 v2(3785,1065) v2(3785,1130)
  Bottom Layer w10: R49.1 3745,843.5 R45.2 v2@3755,810 ; C6.1 3746.5,1065 v2(3785,1065)
NetC7_1: C7.1 R46.2 R50.1 U2.11 | length 494.8
  Top Layer w10: v2(3565,810) 3565,1045 v2(3585,1065) v2(3585,1130)
  Bottom Layer w10: R50.1 3545,843.5 R46.2 v2@3555,810 ; C7.1 3546.5,1065 v2(3585,1065)
NetC8_1: C8.1 R53.2 R57.1 U2.1 | length 534
  Top Layer w10: v2(3365,810) 3365.36,810 3420,864.64 3420,885.36 3385,920.36 v2(3385,1065) v2(3385,1130)
  Bottom Layer w10: R57.1 3345,843.5 R53.2 v2(3365,810) ; C8.1 3383.5,1066.5 v2(3385,1065)
NetC9_1: C9.1 R54.2 R58.1 U2.5 | length 536.7
  Top Layer w10: v2(3170,810) 3170,814.64 3220,864.64 3220,885.36 3185,920.36 v2(3185,1065) v2(3185,1130)
  Bottom Layer w10: R58.1 3145,843.5 R54.2 v2(3170,810) ; C9.1 3183.5,1066.5 v2(3185,1065)
NetC10_1: C10.1 R55.2 R59.1 U2.2 | length 534
  Top Layer w10: v2(2965,810) 2965.36,810 3020,864.64 3020,885.36 2985,920.36 v2(2985,1065) v2(2985,1130)
  Bottom Layer w10: R59.1 2945,843.5 R55.2 v2(2965,810) ; C10.1 2983.5,1066.5 v2(2985,1065)
NetC11_1: C11.1 R56.2 R60.1 U2.4 | length 507.5
  Top Layer w10: v2@2752.5,812.5 2755,815 2755,870.36 2780,895.36 v2(2780,1065) v2(2780,1130)
  Bottom Layer w10: R60.1 2740,848.5 R56.2 v2(2755,810) ; C11.1 2778.5,1066.5 v2(2780,1065)
NetC16_1: C16.1 L1.1 Q24.S Q26.D U4.4 | length 182.2
  Top Layer w10: C16.1@590,3296.5 C16.1 ; v4@672.76,3232.76 U4.4
  Top Layer w20: v4(590,3245) C16.1@590,3296.5
  Bottom Layer w20: v4(590,3245) 655,3245 v4(670,3230)
NetC16_2: C16.2 U4.2 | length 57.5
  Top Layer w10: C16.2 660.75,3295.75 U4.2
NetC17_1: C17.1 L1.2 Q23.S Q25.D U3.4 | length 48
  Top Layer w10: U3.4 C17.1@1885.75,3327.24
NetC17_2: C17.2 U3.2 | length 180
  Top Layer w10: U3.2 1875.75,3264.25 v4(1880,3260) ; C17.2@1950,3328.5 C17.2
  Top Layer w20: v4(1950,3280) C17.2@1950,3328.5
  Bottom Layer w20: v4(1880,3260) 1900,3280 v4(1950,3280)
NetC22_1: C22.1 FB1.2 P2.1
NetC23_1: C23.1 P2.2 R74.1
NetC24_1: C24.1 P2.3 R75.1
NetC25_1: C25.1 FB1.1 U9.12
NetC26_1: C26.1 U9.16
NetC38_2: C38.2 Q27.S Q28.S Q29.S Q30.S U11.3 U12.1 | length 2228.8
  Top Layer w10: Q30.S 880.43,1809.57 880.43,1707.72 916.98,1671.18 953.02,1671.18 985,1703.16 U11.3 ; C38.2@972.6,1280.91 U12.1 972.6,1362.6 995,1385 1020,1385 1047.4,1412.4 ; C38.2 1163.5,1090 Q28.S
  Bottom Layer w80: Q29.S 900,1290 1100,1090 Q28.S ; Q30.S 900,1860 1000.57,1759.43 ; 1010,1750 1101.14,1658.86 Q27.S@1188.86,1658.86
  Bottom Layer w200: 1010,1190.57 1010,1750
NetC39_1: C39.1 U13.2
NetC39_2: C39.2 D1.C L2.1 U13.3
NetC40_1: C40.1 D2.C D3.C Q33.S R86.2 U13.4 U13.5
NetC45_1: C45.1 Q33.D
NetJ1_1: J1.1 R66.1
NetJ1_2: J1.2 SBUS1.1 SBUS2.1 U6.7
NetLED1_A: LED1.A R79.2
NetLED2_A: LED2.A R80.2
NetLED3_A: LED3.A R81.2
NetLED4_A: LED4.A R82.2
NetQ1_D: Q1.D R3.1
NetQ1_G: Q1.G R1.2 R2.1
NetQ2_D: Q2.D R2.2
NetQ3_D: Q3.D R14.1 | length 7.7
  Bottom Layer w20: 3860.08,64.39 3865.51,58.96
NetQ3_G: Q3.G Q7.7 R6.2 | length 1365
  Top Layer w10: Q7.7@4080,1188.62 4130,1188.62 4133.62,1185 4160.36,1185 4205,1140.36 4205,1049.64 4190,1034.64 v2(4190,870)
  Bottom Layer w10: R6.2 3710.91,177.6 Q3.G 4076.89,484.57 4093.44,484.57 4190,581.12 v2(4190,870)
NetQ4_D: Q4.D R15.1 | length 60.8
  Bottom Layer w20: R15.1 Q4.D
NetQ4_G: Q4.G Q7.5 R7.2 | length 608.1
  Top Layer w10: v2(3995,870) 3995,1035 4030,1070 Q7.5@4030,1188.62
  Bottom Layer w10: v2(3995,870) 3995,722.68 Q4.G 4037.6,739.09 R7.2
NetQ5_D: Q5.D R16.1 | length 60.8
  Bottom Layer w20: R16.1 Q5.D
NetQ5_G: Q5.G Q7.3 R8.2 | length 675.8
  Top Layer w10: v2(3795,870) 3795,1039.64 3810,1054.64 3810,1055 3880,1125 3880,1188.62 Q7.3@3930,1188.62
  Bottom Layer w10: v2@3795,865 3795,727.68 Q5.G 3842.6,739.09 R8.2
NetQ6_D: Q6.D R17.1 | length 60.8
  Bottom Layer w20: R17.1 Q6.D
NetQ6_G: Q6.G Q7.1 R9.2 | length 740.6
  Top Layer w10: v2(3595,870) 3595,1035 3748.62,1188.62 3780,1188.62 Q7.1@3830,1188.62
  Bottom Layer w10: v2(3595,870) 3595,727.68 Q6.G 3642.6,739.09 R9.2
NetQ7_9: Q7.9 R10.2 R18.1
NetQ7_11: Q7.11 R11.2 R19.1
NetQ7_13: Q7.13 R12.2 R20.1
NetQ7_15: Q7.15 R13.2 R21.1
NetQ8_D: Q8.D R34.1 | length 60.8
  Bottom Layer w20: R34.1 Q8.D
NetQ8_G: Q8.G R22.2 R26.1 | length 120
  Bottom Layer w10: R26.1@3381.57,680.08 Q8.G R22.2@3442.6,739.09
NetQ9_D: Q9.D R35.1 | length 60.8
  Bottom Layer w20: R35.1 Q9.D
NetQ9_G: Q9.G R23.2 R27.1 | length 120
  Bottom Layer w10: R27.1@3181.57,680.08 Q9.G R23.2@3242.6,739.09
NetQ10_D: Q10.D R36.1 | length 60.8
  Bottom Layer w20: R36.1 Q10.D
NetQ10_G: Q10.G R24.2 R28.1 | length 128.4
  Bottom Layer w10: R28.1@2981.57,680.08 Q10.G 3042.6,739.09 R24.2
NetQ11_D: Q11.D R37.1 | length 67.9
  Bottom Layer w20: Q11.D@2875,589.92 Q11.D@2880,584.92 ; R37.1 Q11.D@2880,584.92 ; Q11.D Q11.D@2880,584.92
NetQ11_G: Q11.G R25.2 R29.1 | length 118.2
  Bottom Layer w10: R29.1@2783.43,680.08 Q11.G R25.2@2842.6,739.09
NetQ12_1: Q12.1 R29.2 | length 459.9
  Top Layer w10: v2(2795,875) 2835,915 Q12.1@2835,1183.62
  Bottom Layer w10: R29.2 2795,761.5 v2(2795,875)
NetQ12_3: Q12.3 R28.2 | length 473.2
  Top Layer w10: Q12.3@2935,1183.62 2935,935 v2(2995,875)
  Bottom Layer w10: R28.2 2995,756.5 v2(2995,875)
NetQ12_5: Q12.5 R27.2 | length 493.9
  Top Layer w10: Q12.5@3085,1183.62 3085,1100 3125,1060 3125,945 v2(3195,875)
  Bottom Layer w10: R27.2 3195,756.5 v2(3195,875)
NetQ12_7: Q12.7 R26.2 | length 544.3
  Top Layer w10: Q12.7@3185,1183.62 3193.62,1175 3208.88,1175 3325,1058.88 3325,945 v2(3395,875)
  Bottom Layer w10: R26.2 3395,756.5 v2(3395,875)
NetQ12_9: Q12.9 R30.2 R38.1
NetQ12_11: Q12.11 R31.2 R39.1
NetQ12_13: Q12.13 R32.2 R40.1
NetQ12_15: Q12.15 R33.2 R41.1
NetQ13_D: Q13.D Q14.G Q15.G Q16.G Q17.G R42.2 | length 1132.4
  Bottom Layer w10: Q17.G 3407.6,1031.48 3477.3,1101.18 3676.15,1101.18 ; Q16.G 3607.6,1032.63 3676.15,1101.18 ; Q15.G 3807.6,1033.78 3875,1101.18 ; Q14.G 4000,972.68 4000,1040 4010,1050 4010,1075.36 3984.17,1101.18 3875,1101.18 ; 3676.15,1101.18 3875,1101.18
NetQ14_D: Q14.D R43.1 | length 71.4
  Bottom Layer w10: Q14.D 4040,813.5 R43.1
NetQ15_D: Q15.D R44.1 | length 66.4
  Bottom Layer w10: R44.1@3845,813.5 Q15.D
NetQ16_D: Q16.D R45.1 | length 66.4
  Bottom Layer w10: R45.1@3645,813.5 Q16.D
NetQ17_D: Q17.D R46.1 | length 66.4
  Bottom Layer w10: R46.1@3445,813.5 Q17.D
NetQ18_D: Q18.D R53.1 | length 66.4
  Bottom Layer w10: R53.1@3245,813.5 Q18.D
NetQ18_G: Q18.G Q19.G Q20.G Q21.G R51.2 R52.1 | length 1101.1
  Bottom Layer w10: Q21.G R51.2@2602.6,1027.6 ; R51.2 2679.69,1101.18 2876.18,1101.18 ; Q20.G 2807.6,1032.6 2876.18,1101.18 ; Q19.G 3007.6,1052.24 3010,1054.64 3010,1075.36 2995.36,1090 2995,1090 2983.82,1101.18 ; Q18.G 3207.6,1052.24 3210,1054.64 3210,1075.36 3184.17,1101.18 2983.82,1101.18 ; 2876.18,1101.18 2983.82,1101.18
NetQ19_D: Q19.D R54.1 | length 66.4
  Bottom Layer w10: R54.1@3045,813.5 Q19.D
NetQ20_D: Q20.D R55.1 | length 66.4
  Bottom Layer w10: R55.1@2845,813.5 Q20.D
NetQ21_D: Q21.D R56.1 | length 70.5
  Bottom Layer w10: R56.1 2640,811.5 Q21.D
NetQ22_D: Q22.D R52.2
NetQ23_G: Q23.G U3.3 | length 999.3
  Top Layer w10: U3.3 1886.68,3295.75 1926.21,3256.21
  Top Layer w60: Q23.G 1735,2430 1927.5,2622.5 1927.5,3229.72
NetQ24_G: Q24.G U4.3 | length 1203.4
  Top Layer w10: 615,3195 615,3220 659.25,3264.25 U4.3
  Top Layer w60: 615,3195 615,2430 815,2230 Q24.G
NetQ25_G: Q25.G U3.8 | length 248
  Top Layer w10: 1682.24,3187.76 U3.8
  Top Layer w60: 1681.58,3187.09 1681.58,3038.42 Q25.G
NetQ26_G: Q26.G U4.8 | length 709.9
  Top Layer w10: U4.8 907.76,3327.24 955,3280
  Top Layer w60: Q26.G 815,2800 754.57,2860.43 754.57,3034.57 955,3235 955,3280
NetQ27_G: Q27.G Q28.G U11.5 | length 974.2
  Top Layer w10: U11.5 935,1585 959.57,1609.57 1210.89,1609.57 1240.43,1639.11 1240.43,1809.57 Q27.G ; 1092.28,1609.57 1111.81,1590.03 1111.81,1368.19 Q28.G
NetQ29_G: Q29.G Q30.G | length 808.6
  Top Layer w10: Q29.G 779.57,1140.43 779.57,1310.89 936.59,1467.91 ; Q30.G 830,1569.18 931.27,1467.91 936.59,1467.91 ; 1010,1431.26 1010,1460 1002.09,1467.91 936.59,1467.91
NetQ33_G: Q33.G R86.1 R87.2
NetQ34_D: Q34.D R87.1
NetR65_1: R65.1 TE1.C
NetR66_2: R66.2 SBUS1.2 SBUS2.2 U6.6
NetR67_1: R67.1 U5.37
NetR72_2: R72.2 RX1.A
NetR73_2: R73.2 TX1.A
NetR74_2: R74.2 U9.9
NetR75_2: R75.2 U9.8
NetR77_2: R77.2 U5.21
NetR85_1: R85.1 U13.8
NetRAIL1_+: RAIL1.+ U16.4 | length 311.9
  Bottom Layer w200: 938.15,260 RAIL1.+
  other v1: 910.67,109.52 959.33,109.52 871.3,138.13 998.7,138.13 856.26,184.41 1013.74,184.41 856.26,237.17 1013.74,237.17 856.26,289.53 1013.74,289.53 856.26,341.89 1013.74,341.89 871.3,388.17 998.7,388.17 910.67,416.78 959.33,416.78
NetRX1_C: RX1.C U9.14
NetTX1_C: TX1.C U9.7
NRST: C26.2 C35.1 P1.5 R78.2 S1.B U5.14
PWR_EN: U10.1
RAIL+: C12.1 D2.A Q24.D Q29.D Q30.D R88.1 U16.5 | length 3524.5
  Top Layer w10: Q29.D 880.43,1240.43 880.43,1339.09 972.6,1431.26
  Bottom Layer w80: 675,1055.82 809.18,1190 Q29.D ; 675,1625.82 809.18,1760 Q30.D ; 675,2195.82 809.18,2330 Q24.D 850.82,2330 1176.57,2655.75 C12.1
  Bottom Layer w200: 675,2195.82 675,1625.82 675,1055.82 675,916.85 v1(856.26,735.59) U16.5
  other v1: 910.67,503.22 959.33,503.22 871.3,531.83 998.7,531.83 856.26,578.11 1013.74,578.11 856.26,630.87 1013.74,630.87 856.26,683.23 1013.74,683.23 1013.74,735.59 871.3,781.87 998.7,781.87 910.67,810.48 959.33,810.48
RAIL_I: U5.30 U16.3
RAIL_V: C48.1 R88.2 R89.1 U5.29
SUBBUS_RE: R63.2 U5.84 U6.2
SUBBUS_RXI: U5.87 U6.1
SUBBUS_TE: R64.1 TE1.A U5.85 U6.3
SUBBUS_TXO: U5.86 U6.4
SWCLK: P1.2 U5.76
SWDIO: P1.4 U5.72
SWO: P1.6 U5.89
TEMP_AMB: U5.15 U7.2
TEMP_BAT: BATTEMP1.2 U5.17
TEMP_FETS: U5.16 U8.2
U3V3: C27.1 R72.1 R73.1 U9.3 U9.10 U9.11
WKUP_CHARGE: R61.2 U5.53 WKUP1.1
WKUP_DISCHARGE: R62.2 U5.54 WKUP1.2
pads on no net: P2. P2.4 U2.8 U5.7 U5.8 U5.9 U5.13 U5.18 U5.34 U5.35 U5.36 U5.47 U5.51 U5.52 U5.55 U5.56 U5.57 U5.58 U5.67 U5.73 U5.77 U5.78 U5.79 U5.80 U5.81 U5.82 U5.83 U5.88 U5.90 U5.91 U5.92 U5.93 U5.95 U5.96 U5.97 U5.98 U11.6 U11.7 U11.8 U12.2 U12.4 U12.5 U12.6 U13.7 U13.9

## Polygon pours and split planes (outlines as drawn)
NetC17_1 on Top Layer "NetC16_1" (solid, pour order 4): 1500,2150 1525,2125 1700,2125 1725,2150 1725,2925 1700,2950 1525,2950 1500,2925
NetC16_1 on Top Layer "NetC16_1" (solid, pour order 5): 1050,2150 1025,2125 850,2125 825,2150 825,2925 850,2950 1025,2950 1050,2925
GND on Top Layer "PowerGND" (solid, shelved, pour order 36): 0,0 2800,0 2800,3500 0,3500

## Dimensions
0,0 to 0,3500 on Mechanical 1
0,3500 to 4250,3500 on Mechanical 1